# EAGLE board servo controller (EAGLE 7.2.0)
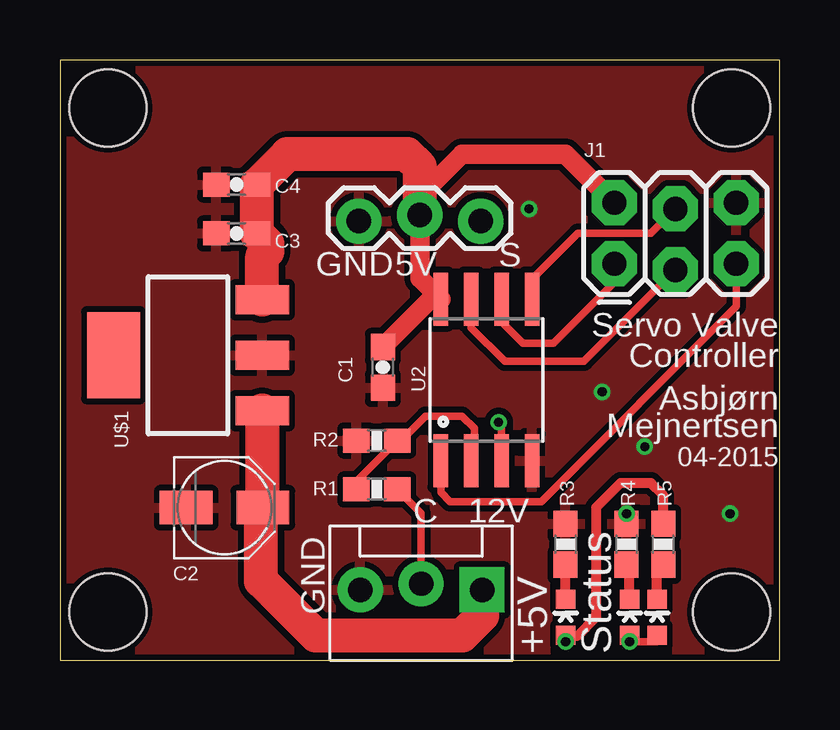
[diagram p0: board, top side]
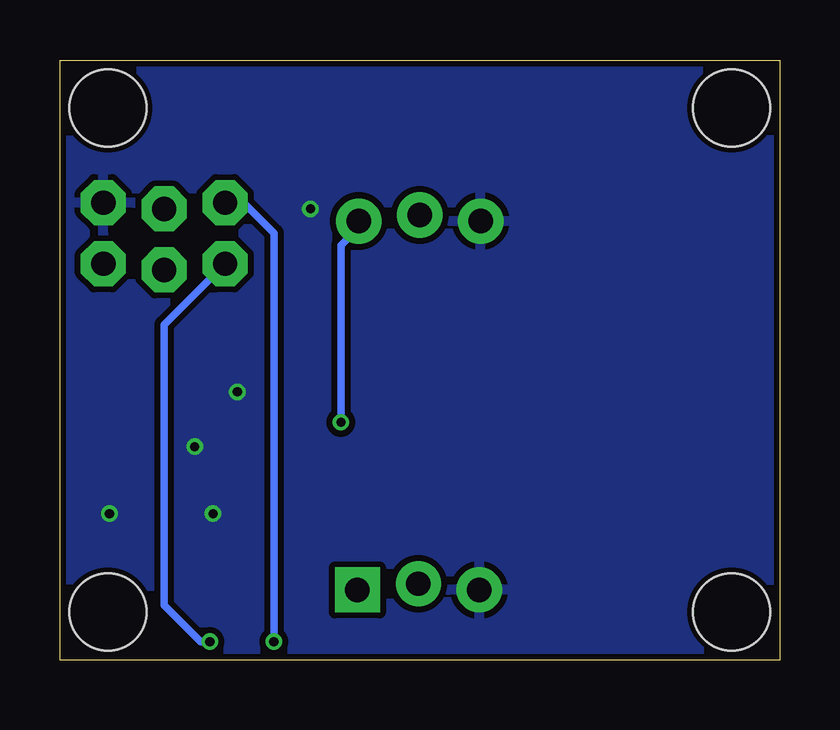
[diagram p1: board, bottom side, seen from below]

Size 30 x 25 mm. Coordinates in mm from the lower left corner, seen from the top.
Outline: 0,0 30,0 30,25 0,25 0,0
Copper layers (1*2*15*16): Top 0.035mm / dielectric 0.2mm / layer 2 0.0175mm / dielectric 1.1mm / layer 15 0.0175mm / dielectric 0.2mm / Bottom 0.035mm
Design rules "SeeedStudio_DRU_no_angle_20130527": minimum track width 6mil, minimum drill 12mil, track to track 6mil, track to pad 6mil, pad to pad 6mil, via to via 6mil, smd to smd 0mil, copper to edge 10mil, drill to drill 10mil, minimum pad ring 6mil, minimum via ring 6mil, stop-mask expansion 2mil, vias tented up to drill 25mil, thermal gap 10mil
Holes 3.2 mm at 2,23 2,2 28,2 28,23

## Footprints (pad centres in the part's own frame; a part is rotated, then mirrored left to right if it is on the bottom)
0603-CAP = smd 1.1 x 1: 1 -0.85,0; 2 0.85,0
PANASONIC_B = smd 2.2 x 1.4: + 1.6,0; - -1.6,0
2X3_LOCK = drill 1.016 pad 1.88 octagon: 1 0,0; 2 0,2.54; 3 2.54,-0.254; 4 2.54,2.286; 5 5.08,0; 6 5.08,2.54
1X03_LOCK = drill 1.016 pad 1.88: 1 0,0.127; 2 2.54,-0.127; 3 5.08,0.127
MOLEX-1X3_LOCK = drill 1.016 pad 1.88 square: 1 0,0.127 | drill 1.016 pad 1.88: 2 2.54,-0.127; 3 5.08,0.127
LED-0603 = smd 0.8 x 0.8: A 0,-0.75; C 0,0.75
0603-RES = smd 1.1 x 1: 1 -0.85,0; 2 0.85,0
SO08-EIAJ = smd 0.61 x 2.21: 1 -1.905,-3.378; 2 -0.635,-3.378; 3 0.635,-3.378; 4 1.905,-3.378; 5 1.905,3.353; 6 0.635,3.353; 7 -0.635,3.353; 8 -1.905,3.353
SOT223 = smd 1.219 x 2.235: 1 -2.311,-3.099; 2 0,-3.099; 3 2.311,-3.099 | smd 3.6 x 2.2: 4 0,3.099

## Placement (x,y rotation side)
C1  100nF  [0603-CAP]  13.46,12.19 90 top
C2  10uF  [PANASONIC_B]  6.86,6.35 0 top
C3  10uF  [0603-CAP]  7.37,17.78 180 top
C4  10nF  [0603-CAP]  7.37,19.81 180 top
J1  AVR_SPI_PRG_62X3_LOCK  [2X3_LOCK]  23.11,16.51 0 top
JP1  [1X03_LOCK]  17.54,18.41 180 top
JP2  [MOLEX-1X3_LOCK]  17.6,3.05 180 top
LED1  [LED-0603]  21.08,1.78 0 top
LED2  [LED-0603]  23.75,1.78 0 top
LED3  [LED-0603]  24.89,1.78 0 top
R1  11k  [0603-RES]  13.21,7.11 0 top
R2  7k5  [0603-RES]  13.21,9.14 0 top
R3  330  [0603-RES]  21.08,4.83 270 top
R4  330  [0603-RES]  23.62,4.83 270 top
R5  330  [0603-RES]  25.15,4.83 270 top
U2  Tiny45-20-SMT  [SO08-EIAJ]  17.78,11.68 0 top
U$1  V_REG_MIC2920  [SOT223]  5.33,12.7 90 top

## Library data of the parts
C1 C3 C4 = SparkFun-Capacitors
C2 = rcl
J1 JP1 JP2 = SparkFun-Connectors
LED1-LED3 = SparkFun-LED
R1-R5 = SparkFun-Resistors
U2 = SparkFun-DigitalIC; PROD_ID: IC-08922
U$1 = SparkFun-PowerIC

## Nets
5V: C1.2 C3.1 C4.1 J1.2 JP1.2 LED1.A R5.1 U2.8 U$1.3
GND: C1.1 C2.- C3.2 C4.2 J1.6 JP1.3 JP2.3 R2.1 R3.1 R4.1 U2.4 U$1.2
INPUT: R1.1 R2.2 U2.2
MISO: J1.1 LED2.A U2.6
MOSI: J1.4 U2.5
N$1: JP2.2 R1.2
N$2: LED1.C R3.2
N$3: LED2.C R4.2
N$4: LED3.C R5.2
RESET: J1.5 U2.1
SCK: J1.3 U2.7
SERVO: JP1.1 U2.3
VIN: C2.+ JP2.1 U$1.1

## Tracks (layer width: path | path; a pad name or v marks a point on that pad's centre or on a via)
5V  (via drill 0.38)
  Top 0.305: LED1.A v21.08,0.76
  Top 0.406: LED1.A 21.09,1.02 21.59,1.02 22.35,1.78 22.35,6.35 23.37,7.37 24.64,7.37 25.15,6.86 R5.1
  Top 0.813: C1.2 15.46,15.04 U2.8 15,15.91 JP1.2 15,19.32 16.76,21.08 21.08,21.08 J1.2
  Top 1.422: U$1.3 8.43,16.82 8.64,17.02 8.64,17.36 C3.1 C4.1 9.49,21.08 14.48,21.08 15,20.56 JP1.2
  Bottom 0.305: v21.08,0.76 21.08,17.78 22.35,19.05 J1.2
GND  (via drill 0.38)
  other vias: 27.94,6.1 23.62,6.1 24.38,8.89 22.61,11.18 19.56,18.8
  pour Bottom (isolate 0.254): 0,0 30,0 30,25 0,25
  pour Top (isolate 0.254): 0,0 30,0 30,25 0,25
INPUT
  Top 0.305: R1.1 12.36,7.44 R2.2 14.22,9.14 15.24,10.16 16.76,10.16 17.27,9.65 17.27,8.43 U2.2
MISO  (via drill 0.38)
  Top 0.305: U2.6 18.41,14.1 19.3,13.21 20.57,13.21 23.11,15.75 J1.1 | LED2.A v23.75,0.76 24.89,0.76 24.89,1.02 24.89,1.14
  Bottom 0.305: J1.1 25.65,13.97 25.65,2.29 24.13,0.76 v23.75,0.76
MOSI
  Top 0.305: U2.5 19.68,15.88 21.59,17.78 24.64,17.78 J1.4
N$1
  Top 0.305: JP2.2 15.06,6.11 R1.2
N$2
  Top 0.406: LED1.C R3.2
N$3
  Top 0.406: LED2.C 23.75,3.85 R4.2
N$4
  Top 0.406: 25.4,3.72 R5.2 24.89,3.72 LED3.C
RESET
  Top 0.305: U2.1 15.88,6.99 16.26,6.6 20.07,6.6 28.19,14.73 J1.5
SCK
  Top 0.305: U2.7 17.14,13.84 18.54,12.45 21.84,12.45 J1.3
SERVO  (via drill 0.38)
  Top 0.305: U2.3 18.41,9.78 v18.29,9.91
  Bottom 0.305: v18.29,9.91 18.29,17.27 17.53,18.03 17.54,18.03 JP1.1
VIN
  Top 1.422: JP2.1 17.6,1.85 16.76,1.02 10.67,1.02 8.38,3.3 8.38,6.27 C2.+ 8.46,10.36 U$1.1

## Text on the board
tPlace: GND | 5V | S | Servo Valve | Controller | Asbjørn | Mejnertsen | 04-2015 | +5V | Status
tNames: C | 12V | GND